# EAGLE board Robot_Psoc_Caras (EAGLE 7.5.0)

Size 176.51 x 115.24 mm. Coordinates in mm from the lower left corner, seen from the top.
Outline: 54.61,114.05 54.61,103.63 57.78,103.63 57.78,69.09
Outline: 54.61,69.09 54.74,69.09
Outline: 54.74,69.09 57.78,69.09
Outline: 3.05,58.8 54.74,58.8 54.74,69.09
Outline: 57.78,69.09 57.91,69.09
Outline: 57.91,103.63 54.74,103.63
Outline: 54.74,113.92 2.92,113.92 2.92,58.8
Outline: 0,0 176.51,0 176.51,115.24 0,115.24 0,0
Outline: 72.34,66.06 84.65,78.36 80.9,82.11 68.6,69.8 72.34,66.06
Outline: 109.2,69.8 96.9,82.11 93.15,78.36 105.46,66.06 109.2,69.8
Outline: 72.34,106.66 68.6,102.92 80.9,90.61 84.65,94.36 72.34,106.66
Outline: 93.15,94.36 96.9,90.61 109.2,102.92 105.46,106.66 93.15,94.36
Outline: 61.4,58.86 61.4,113.86 116.4,113.86 116.4,58.86 61.4,58.86
Outline: 92.9,83.36 92.9,89.36 84.9,89.36 84.9,83.36 92.9,83.36
Outline: 72.34,8.91 84.65,21.21 80.9,24.96 68.6,12.65 72.34,8.91
Outline: 93.15,37.21 96.9,33.46 109.2,45.77 105.46,49.51 93.15,37.21
Outline: 61.4,1.71 61.4,56.71 116.4,56.71 116.4,1.71 61.4,1.71
Outline: 92.9,26.21 92.9,32.21 84.9,32.21 84.9,26.21 92.9,26.21
Outline: 80.9,33.46 84.65,37.21 72.34,49.51 68.6,45.77 80.9,33.46
Outline: 96.9,24.96 93.15,21.21 105.46,8.91 109.2,12.65 96.9,24.96
Outline: 13.92,66.06 26.23,78.36 22.48,82.11 10.18,69.8 13.92,66.06
Outline: 34.73,94.36 38.48,90.61 50.78,102.92 47.04,106.66 34.73,94.36
Outline: 34.48,83.36 34.48,89.36 26.48,89.36 26.48,83.36 34.48,83.36
Outline: 22.48,90.61 26.23,94.36 13.92,106.66 10.18,102.92 22.48,90.61
Outline: 38.48,82.11 34.73,78.36 47.04,66.06 50.78,69.8 38.48,82.11
Outline: 130.76,66.06 143.07,78.36 139.32,82.11 127.02,69.8 130.76,66.06
Outline: 151.57,94.36 155.32,90.61 167.62,102.92 163.88,106.66 151.57,94.36
Outline: 119.82,58.86 119.82,113.86 174.82,113.86 174.82,58.86 119.82,58.86
Outline: 151.32,83.36 151.32,89.36 143.32,89.36 143.32,83.36 151.32,83.36
Outline: 139.32,90.61 143.07,94.36 130.76,106.66 127.02,102.92 139.32,90.61
Outline: 155.32,82.11 151.57,78.36 163.88,66.06 167.62,69.8 155.32,82.11
Outline: circle at 69.23,78.86 radius 4.04
Outline: circle at 69.23,93.86 radius 4.04
Outline: circle at 96.4,66.69 radius 4.04
Outline: circle at 72.34,69.8 radius 0.95
Outline: circle at 75.2,72.66 radius 0.95
Outline: circle at 78.05,75.51 radius 0.95
Outline: circle at 72.34,69.8 radius 0.95
Outline: circle at 78.05,75.51 radius 0.95
Outline: circle at 75.2,72.66 radius 0.95
Outline: circle at 99.75,97.21 radius 0.95
Outline: circle at 102.6,100.06 radius 0.95
Outline: circle at 105.46,102.92 radius 0.95
Outline: circle at 105.46,102.92 radius 0.95
Outline: circle at 102.6,100.06 radius 0.95
Outline: circle at 108.57,93.86 radius 4.04
Outline: circle at 80.9,86.36 radius 1
Outline: circle at 80.9,78.36 radius 0.95
Outline: circle at 99.75,97.21 radius 0.95
Outline: circle at 88.9,94.36 radius 1
Outline: circle at 96.9,94.36 radius 0.95
Copper layers (1*16): Top 0.035mm / dielectric 1.5mm / Bottom 0.035mm
Design rules "default": minimum track width 10mil, minimum drill 24mil, track to track 8mil, track to pad 8mil, pad to pad 8mil, via to via 8mil, smd to smd 8mil, copper to edge 40mil, drill to drill 8mil, minimum pad ring 10mil, minimum via ring 8mil, stop-mask expansion 4mil, vias tented up to drill 0mil, thermal gap 10mil

## Footprints (pad centres in the part's own frame; a part is rotated, then mirrored left to right if it is on the bottom)
C0805 = smd 1.3 x 1.5: 1 -0.95,0; 2 0.95,0
C4532 = smd 1.9 x 3.4: 1 -1.95,0; 2 1.95,0
1X01 = drill 1.016 octagon: 1 0,0
USB-MINIB = smd 0.5 x 2.308: D+ 0,4.064; D- -0.8,4.064; GND 1.6,4.064; ID 0.8,4.064; VBUS -1.6,4.064 | smd 2 x 2.4: GND1 -4.4,-2; GND2 -4.4,3.5; GND3 4.4,3.5; GND4 4.4,-2 | hole 1: -2.2,1; 2.2,1
2X02 = drill 1.016 octagon: 1 -1.27,-1.27; 2 -1.27,1.27; 3 1.27,-1.27; 4 1.27,1.27
1X03 = drill 1.016 long: 1 -2.54,0; 2 0,0; 3 2.54,0
CHIPLED_0805 = smd 1.2 x 1.2: A 0,-1.05; C 0,1.05
MC-405 = smd 4.1 x 4.1: 1 -4,0; 2 4,0
R0805 = smd 1.3 x 1.5: 1 -0.95,0; 2 0.95,0
TQFP64-10X10 = smd 1.2 x 0.3: 1 -5.7,3.75; 2 -5.7,3.25; 3 -5.7,2.75; 4 -5.7,2.25; 5 -5.7,1.75; 6 -5.7,1.25; 7 -5.7,0.75; 8 -5.7,0.25; 9 -5.7,-0.25; 10 -5.7,-0.75; 11 -5.7,-1.25; 12 -5.7,-1.75; 13 -5.7,-2.25; 14 -5.7,-2.75; 15 -5.7,-3.25; 16 -5.7,-3.75; 33 5.7,-3.75; 34 5.7,-3.25; 35 5.7,-2.75; 36 5.7,-2.25; 37 5.7,-1.75; 38 5.7,-1.25; 39 5.7,-0.75; 40 5.7,-0.25; 41 5.7,0.25; 42 5.7,0.75; 43 5.7,1.25; 44 5.7,1.75; 45 5.7,2.25; 46 5.7,2.75; 47 5.7,3.25; 48 5.7,3.75 | smd 0.3 x 1.2: 17 -3.75,-5.7; 18 -3.25,-5.7; 19 -2.75,-5.7; 20 -2.25,-5.7; 21 -1.75,-5.7; 22 -1.25,-5.7; 23 -0.75,-5.7; 24 -0.25,-5.7; 25 0.25,-5.7; 26 0.75,-5.7; 27 1.25,-5.7; 28 1.75,-5.7; 29 2.25,-5.7; 30 2.75,-5.7; 31 3.25,-5.7; 32 3.75,-5.7; 49 3.75,5.7; 50 3.25,5.7; 51 2.75,5.7; 52 2.25,5.7; 53 1.75,5.7; 54 1.25,5.7; 55 0.75,5.7; 56 0.25,5.7; 57 -0.25,5.7; 58 -0.75,5.7; 59 -1.25,5.7; 60 -1.75,5.7; 61 -2.25,5.7; 62 -2.75,5.7; 63 -3.25,5.7; 64 -3.75,5.7
XDCR_VCNL4010-GS08 = smd 0.805 x 0.35: 1 -1.772,1.5; 2 -1.772,0.75; 3 -1.772,0; 4 -1.772,-0.75; 5 -1.772,-1.5; 7 1.772,-1.5; 8 1.772,-0.75; 9 1.772,0; 10 1.772,0.75; 11 1.772,1.5 | smd 0.4 x 0.805: 6 -0.8,-1.772; 12 -0.175,1.772; 13 0,-1.772
SO8 = smd 0.66 x 2.032: 1 -1.905,-3.073; 2 -0.635,-3.073; 3 0.635,-3.073; 4 1.905,-3.073; 5 1.905,3.073; 6 0.635,3.073; 7 -0.635,3.073; 8 -1.905,3.073
TO252 = smd 1 x 1.6: 1 -2.28,-4.8; 2 2.28,-4.8 | smd 5.4 x 6.2: 3 0,2.5

## Placement (x,y rotation side)
C1  0.1uF  [C0805]  77.47,110.49 90 top
C2  0.1uF  [C0805]  74.93,105.41 0 top
C3  10uF  [C4532]  71.12,110.49 0 top
C4  2200pF  [C0805]  147.32,64.77 90 top
C5  10nF  [C0805]  144.78,73.66 0 top
C6  1u  [C0805]  161.29,67.31 0 top
C7  0.1uF  [C0805]  163.83,71.12 270 top
C8  0.1uF  [C0805]  171.45,71.12 270 top
CANH  [1X01]  161.29,72.39 0 top
CANL  [1X01]  163.83,69.85 0 top
CN1  [USB-MINIB]  168.91,107.95 180 top
CONMUTADOR  [2X02]  88.9,63.5 0 top
DINA  [1X03]  97.79,63.5 270 top
LED1  [CHIPLED_0805]  144.78,86.36 0 bottom
LED2  [CHIPLED_0805]  86.36,86.36 180 bottom
LED3  [CHIPLED_0805]  27.94,86.36 180 bottom
LED4  [CHIPLED_0805]  86.36,29.21 0 bottom
LED5  [CHIPLED_0805]  109.22,110.49 0 top
Q1  MC-405  [MC-405]  167.64,76.2 0 top
R1  0  [R0805]  170.18,99.06 270 top
R2  0  [R0805]  167.64,99.06 270 top
R3  0  [R0805]  165.1,99.06 270 top
R4  10k  [R0805]  149.86,85.09 270 top
R5  10k  [R0805]  147.32,85.09 270 top
R6  10k  [R0805]  91.44,85.09 270 top
R7  10k  [R0805]  88.9,85.09 270 top
R8  10k  [R0805]  33.02,85.09 270 top
R9  10k  [R0805]  30.48,85.09 90 top
R10  10k  [R0805]  91.44,27.94 270 top
R11  10k  [R0805]  88.9,27.94 270 top
R12  220  [R0805]  147.32,88.9 180 top
R13  220  [R0805]  87.63,88.9 180 top
R14  220  [R0805]  31.75,88.9 0 top
R15  220  [R0805]  88.9,31.75 180 top
R16  120  [R0805]  162.56,62.23 270 top
R17  10k  [R0805]  157.48,62.23 270 top
R18  0  [R0805]  149.86,64.77 270 top
R19  220  [R0805]  144.78,85.09 270 top
R20  220  [R0805]  86.36,85.09 90 top
R21  220  [R0805]  27.94,85.09 90 top
R22  220  [R0805]  86.36,27.94 270 top
R23  220  [R0805]  105.41,110.49 270 top
U1  CY8C4247AZI-M485  [TQFP64-10X10]  167.64,86.36 0 top
U2  VCNL4010-GS08  [XDCR_VCNL4010-GS08]  148.59,86.36 270 bottom
U3  VCNL4010-GS08  [XDCR_VCNL4010-GS08]  90.17,86.36 270 bottom
U4  VCNL4010-GS08  [XDCR_VCNL4010-GS08]  31.75,86.36 270 bottom
U5  VCNL4010-GS08  [XDCR_VCNL4010-GS08]  90.17,29.21 270 bottom
U$1  SN65HVD230/1  [SO8]  168.91,63.5 0 top
VREG3V3  7824DT  [TO252]  88.9,109.22 90 top

## Library data of the parts
C1-C8 R1-R23 = rcl
CANH CANL CONMUTADOR DINA = pinhead
CN1 LED1-LED5 VREG3V3 = adafruit
Q1 = crystal; OC_FARNELL: unknown; OC_NEWARK: unknown
U1 = CypressPSoC
U2-U5 = VCNL4010-GS08
U$1 = texas_instruments

## Nets
+3V3: C1.1 C2.1 C3.1 CN1.VBUS LED5.A R4.2 R5.2 R6.2 R7.2 R8.2 R9.2 R10.2 R11.2 U1.11 U1.26 U1.48 U1.50 U1.56 U2.1 U2.7 U3.1 U3.7 U4.1 U4.7 U5.1 U5.7 U$1.3 VREG3V3.2
+10V: DINA.2 VREG3V3.1
CAN_RX: U1.39 U$1.4
CAN_TX: U1.40 U$1.1
CTANK: C5.1 U1.30
GND: C1.2 C2.2 C3.2 C4.2 C5.2 C6.2 C7.2 C8.2 CN1.D+ DINA.3 R12.2 R13.2 R14.2 R15.2 R17.2 R19.2 R20.2 R21.2 R22.2 R23.2 U1.10 U1.17 U1.49 U1.57 U2.12 U2.13 U3.12 U3.13 U4.12 U4.13 U5.12 U5.13 U$1.2 VREG3V3.3
LED_S1: LED1.A U1.63
LED_S2: LED2.A U1.62
LED_S3: LED3.A U1.61
LED_S4: LED4.A U1.60
MOTOR: CONMUTADOR.1 U1.13 U1.14
N$1: CN1.D- R1.1
N$2: CN1.ID R2.1
N$3: CN1.GND R3.1
N$4: R12.1 U2.2 U2.3
N$5: CONMUTADOR.3 R16.2 U$1.7
N$6: R13.1 U3.2 U3.3
N$7: CANL.1 R16.1 U$1.6
N$8: R14.1 U4.2 U4.3
N$9: R17.1 U$1.8
N$10: R15.1 U5.2 U5.3
N$11: C4.1 R18.2
N$12: CANH.1 CONMUTADOR.4
N$13: CONMUTADOR.2 DINA.1
N$14: LED1.C R19.1
N$15: LED2.C R20.1
N$16: LED3.C R21.1
N$17: LED4.C R22.1
N$18: LED5.C R23.1
SAR_BY: C6.1 U1.1
SCL_S1: R4.1 U1.2 U2.5
SCL_S2: R6.1 U1.4 U3.5
SCL_S3: R8.1 U1.6 U4.5
SCL_S4: R10.1 U1.8 U5.5
SDA_S1: R5.1 U1.3 U2.4
SDA_S2: R7.1 U1.5 U3.4
SDA_S3: R9.1 U4.4
SDA_S4: R11.1 U1.7 U5.4
SHUNT: R18.1 U1.29
SWDCLK: R2.2 U1.21
SWDIO: R3.2 U1.20
X1: C7.1 Q1.1 U1.43
X2: C8.1 Q1.2 U1.44
XRES: R1.2 U1.47

## Tracks (layer width: path | path; a pad name or v marks a point on that pad's centre or on a via)
+3V3  (27 unrouted)
+10V  (1 unrouted)
CAN_RX  (1 unrouted)
CAN_TX  (1 unrouted)
CTANK  (1 unrouted)
GND  (33 unrouted)
LED_S1  (1 unrouted)
LED_S2  (1 unrouted)
LED_S3  (1 unrouted)
LED_S4  (1 unrouted)
MOTOR  (2 unrouted)
N$1  (1 unrouted)
N$2  (1 unrouted)
N$3  (1 unrouted)
N$4  (2 unrouted)
N$5  (2 unrouted)
N$6  (2 unrouted)
N$7  (2 unrouted)
N$8  (2 unrouted)
N$9  (1 unrouted)
N$10  (2 unrouted)
N$11  (1 unrouted)
N$12  (1 unrouted)
N$13  (1 unrouted)
N$14  (1 unrouted)
N$15  (1 unrouted)
N$16  (1 unrouted)
N$17  (1 unrouted)
N$18  (1 unrouted)
SAR_BY  (1 unrouted)
SCL_S1  (2 unrouted)
SCL_S2  (2 unrouted)
SCL_S3  (2 unrouted)
SCL_S4  (2 unrouted)
SDA_S1  (2 unrouted)
SDA_S2  (2 unrouted)
SDA_S3  (1 unrouted)
SDA_S4  (2 unrouted)
SHUNT  (1 unrouted)
SWDCLK  (1 unrouted)
SWDIO  (1 unrouted)
X1  (2 unrouted)
X2  (2 unrouted)
XRES  (1 unrouted)